# Altium PCB Lora_feather.PcbDoc (part 1 of 2)
Units mm, origin at the board's own origin, x right, y up, seen from the top; angles counter-clockwise.
Board outline 96.47 x 23.21 mm, 2 copper layers (Top Layer, Bottom Layer); 61 components, 62 nets, 278 pads, 260 vias.
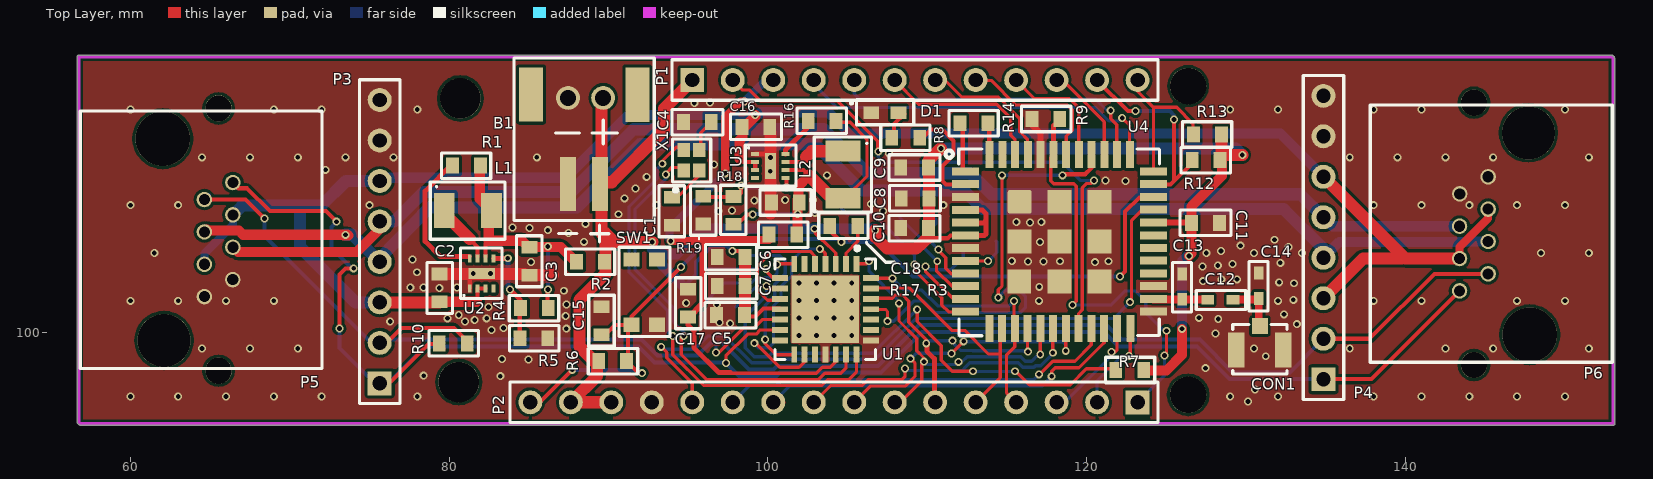
[diagram p0: Top Layer view]
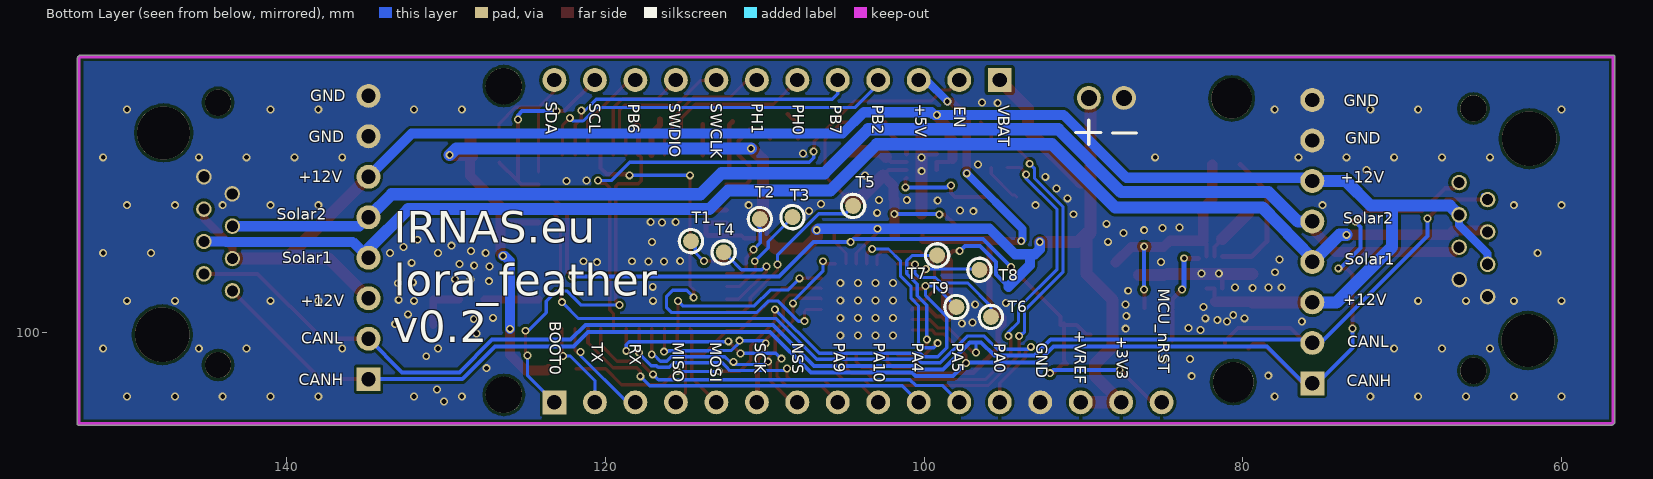
[diagram p1: Bottom Layer view, seen from below]
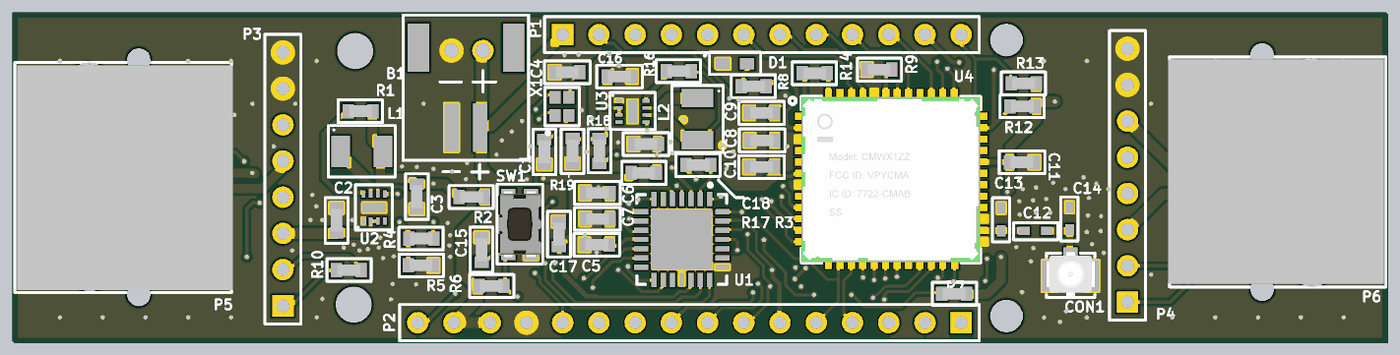
[diagram p2: 3D render of the assembled board from above, using the file's embedded part models]

## Layer stack, top to bottom
Top Solder: solder mask 0.0102, Solder Resist, Dk 3.5
Top Layer: signal copper 0.0356
Dielectric 1: dielectric 0.32, FR-4, Dk 4.2
Bottom Layer: signal copper 0.0356
Bottom Solder: solder mask 0.0102, Solder Resist, Dk 3.5

## Board outline
56.689,94.319 cw(c56.76,94.39) 56.66,94.39 56.66,117.31 cw(c56.76,117.31) 56.76,117.41 152.94,117.41 cw(c152.94,117.31) 153.011,117.381 153.081,117.311 cw(c153.01,117.24) 153.11,117.24 153.11,94.36 cw(c153.03,94.3) 153.13,94.3 cw(c153.03,94.3) 153.03,94.2 56.85,94.2 cw(c56.85,94.3) 56.779,94.229

## Design rules (kind name [scope] priority, off if disabled: settings)
Clearance "Schematic Clearance Constraint" [InNetClass('50R')] p1: gap=0.157 ignorepadtopadclearanceinfootprint=FALSE except(0: Arc-Hole Track-Hole SMDPad-Hole THPad-Hole Via-Hole Fill-Hole Poly-Hole Region-Hole Text-Hole)
Clearance [All] p2: gap=0.178 ignorepadtopadclearanceinfootprint=FALSE
HoleSize [All] p1: absolutevalues=TRUE maxlimit=3.81 minlimit=0.025 maxpercent=80.000 minpercent=20.000
MinimumSolderMaskSliver [All] p1: minsoldermaskwidth=0.01
PlaneConnect [All] p1: planeconnectstyle=Direct reliefexpansion=0.508 reliefentries=4 reliefconductorwidth=0.254 reliefairgap=0.254
PolygonConnect [All] p1: connectstyle=Direct reliefconductorwidth=0.254 reliefentries=4 polygonreliefangle="90 Angle" airgapwidth=0.254
RoutingVias [All] p1: holewidth=0.3 width=0.5 viastyle="Through Hole" minholewidth=0.3 minwidth=0.5 maxholewidth=0.3 maxwidth=0.5
SilkToSilkClearance [All] p1: silktosilkclearance=0.005
SilkToSolderMaskClearance [IsPad] p1: minsilkscreentomaskgap=0.01 clearancetoexposedcopper=TRUE
SolderMaskExpansion [All] p1: expansion=0.102
Width [All] p1: maxlimit=0.762 minlimit=0.203 preferedwidth=0.305
25 further rules are at their usual default settings.

## Classes and differential pairs
net class 50R: ANT NetC12_2

## Components (designator, comment, footprint, x,y, rotation, side; value= is the part's Value field where it differs from the comment)
B1 "Battery connector" BAT_CON 92.56,113.23 r180 top
C1 "10pF cap" 0603CAP 93.97,107.62 r90 top
C2 "10uF" 0603CAP 79.4,102.81 r90 top
C3 "10uF" 0603CAP 85.03,104.48 r270 top
C4 "10pF cap" 0603CAP 95.57,113.21 r0 top
C5 "10uF" 0603CAP 97.65,101.1 r180 top
C6 "0.1uF" 0603CAP 97.69,104.74 r0 top
C7 "0.1uF" 0603CAP 97.69,102.92 r0 top
C8 "10uF" 0603CAP 109.23,108.43 r180 top
C9 "1uF" 0603CAP 109.2,110.36 r180 top
C10 "0.1uF" 0603CAP 109.2,106.56 r0 top
C11 "1uF" 0603CAP 127.45,106.89 r180 top
C12 "100pF" 0402CAP 128.37,102.05 r0 top
C13 "NF" 0402CAP 125.98,102.9 r270 top
C14 "NF" 0402CAP 130.77,102.96 r270 top
C15 "0.1uF" 0603CAP 89.56,100.75 r90 top
C16 "10uF" 0603Cap 99.24,112.91 r0 top
C17 "10uF" 0603CAP 94.99,101.85 r90 top
C18 "22uF" 0603Cap 101.09,108.17 r0 top
CON1 "antena connector" "UFL SMD CONNECTOR" 130.86,99.04 r0 top
D1 "LED diode" LED 107.33,113.8 r180 top
L1 "15uH" "INDUCTOR 3.0X2.5" 81.21,107.66 r0 top
L2 "10uH" "INDUCTOR 3.0X2.5" 104.7,109.88 r270 top
P1 "Header 12" HDR1X12 95.25,115.85 r0 top
P2 "Header 16" HDR1X16 123.19,95.631 r180 top
P3 "Header 8" HDR1X8 75.64,96.82 r90 top
P4 "Header 8" HDR1X8 134.85,97.08 r90 top
P5 "RJ45" "ETHERNET CONN" 62.02,109.42 r270 top
P6 "RJ45" "ETHERNET CONN" 147.8,102.62 r90 top
R1 "0R" 0603RES 83.64,110.41 r0 top
R2 "0R" 0603RES 91.42,104.38 r0 top
R3 "0R" 0603RES 107.31,106.63 r0 top
R4 "1M8" 0603RES 87.9,101.47 r0 top
R5 "576K" 0603RES 82.76,99.72 r180 top
R6 "10K" 0603RES 87.7,98.28 r180 top
R7 "10K" 0603RES 120.14,97.73 r180 top
R8 "1K" 0603RES 111.2,112.16 r0 top
R9 "10K" 0603RES 114.88,113.47 r180 top
R10 "120R" 0603RES 77.7,99.4 r180 top
R12 "10K" 0603RES 130.04,110.75 r0 top
R13 "10K" 0603RES 130.13,112.36 r0 top
R14 "0R" 0603RES 115.48,113.07 r0 top
R16 "0R" 0603RES 105.95,113.22 r0 top
R17 "0R" 0603RES 98.38,106.22 r180 top
R18 "1M1" 0603RES 97.76,105.12 r270 top
R19 "210K" 0603RES 96.01,110.24 r90 top
SW1 "Tactile button" "TACTILE BUTTON" 92.25,102.56 r90 top
T1 "Test_pad" TEST_PAD 114.62,105.74 r180 bottom
T2 "Test_pad" TEST_PAD 110.3,107.13 r180 bottom
T3 "Test_pad" TEST_PAD 108.25,107.25 r180 bottom
T4 "Test_pad" TEST_PAD 112.57,105.04 r180 bottom
T5 "Test_pad" TEST_PAD 104.45,107.95 r180 bottom
T6 "Test_pad" TEST_PAD 95.8,100.986 r180 bottom
T7 "Test_pad" Test_Pad 99.18,104.85 r180 bottom
T8 "Test_pad" Test_Pad 96.52,103.94 r180 bottom
T9 "Test_pad" Test_Pad 97.97,101.61 r180 bottom
U1 "Can bus and tranciver" MCP25625 103.6,101.47 r270 top
U2 "TPS62125DSGR" "WSON-VOLTAGE REGULATOR" 82.04,103.71 r90 top
U3 "TPS62125DSGR" "WSON-Voltage regulator" 100.15,110.46 r0 top
U4 "Lora module ES0" "LORA MODULE ES0" 118.33,105.67 r0 top
X1 "Crystall" IQXC-42 94.71,111.45 r90 top

## Footprints (in the part's own frame and the unit in brackets; to place one, negate y for a bottom-side part, rotate by r counter-clockwise, add the part's x,y. Pads: shape width x height; smd on the part's side, far side on the other; paste and mask are expansions set on the pad)
0402CAP [mm]
  rect 0.8x0.6 smd: 1(-0.78,0.02) 2(0.81,0.02)
  silkscreen extent -1.5,-0.6 1.6,0.6, body extent -0.53,-0.29 0.57,0.31, height 1.5
0603CAP [mm]
  rect 0.8x1 smd paste+0 mask+0.102: 1(-0.873,0) 2(0.873,0)
  silkscreen extent -1.6,-0.8 1.6,0.8, body extent -0.8,-0.4 0.8,0.4, height 0.45
0603Cap [mm]
  rect 0.8x1 smd paste+0 mask+0.102: 1(-0.873,0) 2(0.873,0)
  silkscreen extent -1.6,-0.8 1.6,0.8, body extent -0.8,-0.4 0.8,0.4, height 0.45
0603RES [mm]
  rect 0.8x1 smd paste+0 mask+0.102: 1(-3.429,0.07) 2(-1.682,0.07)
  silkscreen extent -4.13,-0.73 -1.03,0.87, body extent -3.36,-0.33 -1.76,0.47, height 0.45
BAT_CON [mm]
  round 1.5 hole 1: 1(2.9,-1.5) 2(5.1,-1.5)
  rect 1x3.4 smd: 1(3.098,3.899) 2(5.108,3.901)
  rect 1.5x3.4 smd: ""(0.75,-1.7) ""(7.421,-1.711)
  silkscreen extent -0.3,-4 8.5,7.52
"ETHERNET CONN" [mm]
  round 0.97 hole 0.7: 1(0,4.41) 2(1.07,2.62) 3(2.03,4.41) 4(3.1,2.62) 5(4.06,4.41) 6(5.13,2.62) 7(6.09,4.4) 8(7.16,2.62)
  round 1.65 hole 1.65 unplated: ""(-4.65,3.51) ""(11.81,3.51)
  round 3.43 hole 3.43 unplated: ""(-2.75,0.01)
  round 3.33 hole 3.33 unplated: ""(9.91,0.09)
  silkscreen extent -4.48,-5.17 11.67,10.01, body extent -4.32,-5.01 11.56,10.09, height 13.21
HDR1X8 [mm] "Connector; Header; 8 Position"
  rect 1.5x1.5 hole 0.9: 1(0,0)
  round 1.5 hole 0.9: 2(2.54,0) 3(5.08,0) 4(7.62,0) 5(10.16,0) 6(12.7,0) 7(15.24,0) 8(17.78,0)
  silkscreen extent -1.27,-1.27 19.05,1.27
HDR1X12 [mm] "Connector; Header; 12 Position"
  rect 1.5x1.5 hole 0.9: 1(0,0)
  round 1.5 hole 0.9: 2(2.54,0) 3(5.08,0) 4(7.62,0) 5(10.16,0) 6(12.7,0) 7(15.24,0) 8(17.78,0) 9(20.32,0) 10(22.86,0) 11(25.4,0) 12(27.94,0)
  silkscreen extent -1.27,-1.27 29.21,1.27
HDR1X16 [mm] "Connector; Header; 16 Position"
  rect 1.5x1.5 hole 0.9: 1(0,0)
  round 1.5 hole 0.9: 2(2.54,0) 3(5.08,0) 4(7.62,0) 5(10.16,0) 6(12.7,0) 7(15.24,0) 8(17.78,0) 9(20.32,0) 10(22.86,0) 11(25.4,0) 12(27.94,0) 13(30.48,0) 14(33.02,0) 15(35.56,0) 16(38.1,0)
  silkscreen extent -1.27,-1.27 39.37,1.27
"INDUCTOR 3.0X2.5" [mm]
  rect 1.3x2.2 smd: 1(-1.52,0) 2(1.44,0)
  silkscreen extent -2.4,-1.8 2.3,1.8, body extent -1.35,-1.6 1.35,1.6, height 1.5
IQXC-42 [mm] "crystall"
  rect 0.875x0.775 smd: 1(-1.275,0) 2(-1.275,-0.975) 3(0,0) 4(0,-0.975)
  silkscreen extent -2.6,-1.7 0.7,0.7, body extent -1.7,-1.3 0.4,0.3, height 1
LED [mm]
  rect 1x0.8 smd: 1(0.85,0) 2(-0.85,0)
  silkscreen extent -1.81,-0.81 2.13,0.75, body extent -0.9,-0.4 0.8,0.4, height 1
"LORA MODULE ES0" [mm]
  rect 1.7x0.5 smd paste-5: 1(-5.94,4.45) 2(-5.94,3.65) 3(-5.94,2.84) 4(-5.94,2.04) 5(-5.94,1.24) 6(-5.94,0.44) 7(-5.94,-0.35) 8(-5.94,-1.16) 9(-5.94,-1.96) 10(-5.94,-2.75) 11(-5.94,-3.56) 12(-5.94,-4.35) 25(5.862,-4.355) 26(5.862,-3.554) 27(5.862,-2.752) 28(5.862,-1.955) 29(5.862,-1.155) 30(5.862,-0.355) 31(5.86,0.44) 32(5.86,1.25) 33(5.86,2.05) 34(5.86,2.84) 35(5.86,3.65) 36(5.86,4.45)
  rect 0.5x1.7 smd paste-5: 13(-4.44,-5.405) 14(-3.638,-5.405) 15(-2.838,-5.405) 16(-2.038,-5.405) 17(-1.238,-5.405) 18(-0.438,-5.405) 19(0.362,-5.405) 20(1.162,-5.404) 21(1.962,-5.404) 22(2.762,-5.405) 23(3.569,-5.405) 24(4.41,-5.405) 37(4.37,5.5) 38(3.56,5.5) 39(2.77,5.5) 40(1.97,5.5) 41(1.17,5.5) 42(0.37,5.5) 43(-0.43,5.5) 44(-1.23,5.5) 45(-2.03,5.5) 46(-2.83,5.5) 47(-3.63,5.5) 48(-4.44,5.5)
  rrect20% 1.5x1.5 smd: 49(-2.538,2.545)
  rect 1.5x1.5 smd: 50(-0.038,2.545) 51(2.462,2.545) 52(-2.538,0.045) 53(-0.038,0.045) 54(2.462,0.045) 55(-2.563,-2.455) 56(-0.038,-2.455) 57(2.462,-2.455)
  silkscreen extent -7.19,-5.86 6.23,5.86, body extent -6.33,-5.8 6.17,5.8, height 1.76
MCP25625 [mm] "QFN, 28-Leads, Body 6.00x6.00mm, Pitch 0.65mm, Thermal Pad 4.25x4.25mm, IPC Medium Density"
  rect 1x0.37 smd: 1(-2.85,1.95) 2(-2.85,1.3) 3(-2.85,0.65) 4(-2.85,0) 5(-2.85,-0.65) 6(-2.85,-1.3) 7(-2.85,-1.95) 15(2.85,-1.95) 16(2.85,-1.3) 17(2.85,-0.65) 18(2.85,0) 19(2.85,0.65) 20(2.85,1.3) 21(2.85,1.95)
  rect 0.37x1 smd: 8(-1.95,-2.85) 9(-1.3,-2.85) 10(-0.65,-2.85) 11(0,-2.85) 12(0.65,-2.85) 13(1.3,-2.85) 14(1.95,-2.85) 22(1.95,2.85) 23(1.3,2.85) 24(0.65,2.85) 25(0,2.85) 26(-0.65,2.85) 27(-1.3,2.85) 28(-1.95,2.85)
  rect 4.25x4.25 smd: 29(0,0)
  silkscreen extent -3.95,-3.15 3.15,3.15, body extent -3,-3 3,3, height 0.9
"TACTILE BUTTON" [mm]
  rect 0.9x1 smd: 1(-2.072,-0.78) 2(2.028,-0.78) 3(2.028,0.82) 4(-2.072,0.82)
  silkscreen extent -2.8,-1.6 2.8,1.6, body extent -2.32,-1.49 2.28,1.51, height 2.1
TEST_PAD [mm]
  round 1 smd: 1(0,0)
  silkscreen extent -0.73,-0.73 0.73,0.73
Test_Pad [mm]
  round 1 smd: 1(0,0)
  silkscreen extent -0.73,-0.73 0.73,0.73
"UFL SMD CONNECTOR" [mm]
  rect 1x1 smd: 1(0,1.373)
  rect 1.05x2.2 smd: 2(-1.475,-0.127) 2(1.475,-0.127)
  silkscreen extent -1.7,-1.63 1.7,1.47, body extent -1.7,-1.55 1.7,1.55, height 1.25
"WSON-VOLTAGE REGULATOR" [mm] "SON, 8-Leads, Body 2.00x2.00mm, Pitch 0.50mm, Thermal Pad 1.65x0.69mm, IPC Medium Density"
  rect 0.5x0.25 smd: 1(-0.95,0.75) 2(-0.95,0.25) 3(-0.95,-0.25) 4(-0.95,-0.75) 5(0.95,-0.75) 6(0.95,-0.25) 7(0.95,0.25) 8(0.95,0.75)
  rect 0.69x1.65 smd: 9(0,0)
  silkscreen extent -1.57,-1.27 1.6,1.32, body extent -1.05,-1.05 1.05,1.05, height 0.8
"WSON-Voltage regulator" [mm] "SON, 8-Leads, Body 2.00x2.00mm, Pitch 0.50mm, Thermal Pad 1.65x0.69mm, IPC Medium Density"
  rect 0.5x0.25 smd: 1(-0.95,0.75) 2(-0.95,0.25) 3(-0.95,-0.25) 4(-0.95,-0.75) 5(0.95,-0.75) 6(0.95,-0.25) 7(0.95,0.25) 8(0.95,0.75)
  rect 0.69x1.65 smd: 9(0,0)
  silkscreen extent -1.57,-1.27 1.6,1.32, body extent -1.05,-1.05 1.05,1.05, height 0.8

## Part data
B1: library part 1862, "JST-PH 2-Pin SMT Right Angle Breakout Board", Manufacturer="Adafruit Industries", Supplier Part Number 1=485-1862, Manufacturer Part Number=1862, Pricing 1="1=1.5, 10=1.5, 50=1.5, 100=1.5, 1000=1.5, 10000=1.5 (USD)", Stock 1=115, Supplier 1=Mouser
C1 C4: library part 10pF, "Cap Ceramic 10pF 50V X7R 10% SMD 0603 125C T/R", Capacitance="10 pF", Case Size/Dimension=0603, Dielectric=X7R, Manufacturer="Kyocera AVX", Manufacturer Part Number=06035C100KAT2A, Rated Voltage="50 V", Supplier Part Number 1=2665201, Tolerance (%)="±10 %", ComponentLink1Description=https://datasheet.ciiva.com/204/cx7r-204167.pdf, ComponentLink1URL=https://datasheet.ciiva.com/204/cx7r-204167.pdf, ComponentLink2Description=https://datasheet.ciiva.com/28611/1679506-28611544.pdf, ComponentLink2URL=https://datasheet.ciiva.com/28611/1679506-28611544.pdf, ComponentLink3Description=https://datasheet.ciiva.com/22677/1679506-22677033.pdf, ComponentLink3URL=https://datasheet.ciiva.com/22677/1679506-22677033.pdf, ComponentLink4Description=https://datasheet.ciiva.com/16327/cx7r-16327067.pdf, ComponentLink4URL=https://datasheet.ciiva.com/16327/cx7r-16327067.pdf, ComponentLink5Description=https://datasheet.ciiva.com/5416/cx7r-5416268.pdf, ComponentLink5URL=https://datasheet.ciiva.com/5416/cx7r-5416268.pdf, ComponentLink6Description=https://datasheet.ciiva.com/15212/getdatasheetpartid-317346-15212284.pdf, ComponentLink6URL=https://datasheet.ciiva.com/15212/getdatasheetpartid-317346-15212284.pdf, Stock 1=0, Supplier 1=Farnell
C2 C3 C5 C8 C16 C17: library part "10uF Cap", "MURATA         ZRB18AR61E106ME01L             SMD Multilayer Ceramic Capacitor, 0603 [1608 Metric], 10 F, 25 V,  20%, X5R, ZRA Series", Capacitance=10µF, Manufacturer=Murata, Manufacturer Part Number=ZRB18AR61E106ME01L, Operating Temperature="-55°C ~ 85°C", Package / Case="0603 (1608 Metric)", Ratings=-, Supplier Part Number 1=2469398, Temperature Coefficient=X5R, Tolerance=±20%, Voltage - Rated=25V, Applications="Acoustic Noise Reduction", Category=Capacitors, ComponentLink1Description=http://www.farnell.com/datasheets/2243360.pdf, ComponentLink1URL=http://www.farnell.com/datasheets/2243360.pdf, ComponentLink2Description=http://www.farnell.com/datasheets/2163235.pdf, ComponentLink2URL=http://www.farnell.com/datasheets/2163235.pdf, ComponentLink3Description=http://search.murata.co.jp/Ceramy/image/img/A01X/G101/ENG/ZRB18AR61E106ME01-01.pdf, ComponentLink3URL=http://search.murata.co.jp/Ceramy/image/img/A01X/G101/ENG/ZRB18AR61E106ME01-01.pdf, Family="Ceramic Capacitors", Features="Interposer Termination", Height - Seated (Max)=-, Lead Spacing=-, Lead Style=-, Mounting Type="Surface Mount, MLCC", Packaging="Tape & Reel (TR)", Pricing 1="5=0.411, 50=0.187, 250=0.142, 500=0.0978, 1500=0.091 (GBP)", Series=ZRB, Size / Dimension="0.063\" L x 0.031\" W (1.60mm x 0.80mm)", Stock 1=0, Supplier 1=Farnell, Thickness (Max)="0.047\" (1.20mm)"
C6 C7 C10 C15: "Multilayer Ceramic Capacitors MLCC - SMD/SMT .1uF 50Volts X7R +/-10% 0603 STD", Capacitance=0.1µF, Capacitance Tolerance="± 10%", Ceramic Capacitor Case="0603 [1608 Metric]", Dielectric Characteristic=X7R, Manufacturer=KEMET, Manufacturer Part Number=C0603C104K4RAC7081, Operating Temperature Max=125°C, Operating Temperature Min=-55°C, Supplier Part Number 1=2522597, Voltage Rating=16V, Automotive Qualification Standard=-, ComponentLink1Description=http://www.farnell.com/datasheets/2112158.pdf, ComponentLink1URL=http://www.farnell.com/datasheets/2112158.pdf, ComponentLink2Description=http://www.farnell.com/datasheets/2316283.pdf, ComponentLink2URL=http://www.farnell.com/datasheets/2316283.pdf, ComponentLink3Description=https://api.kemet.com/component-edge/download/datasheet/C0603C104K4RAC7081.pdf, ComponentLink3URL=https://api.kemet.com/component-edge/download/datasheet/C0603C104K4RAC7081.pdf, MSL="MSL 1 - Unlimited", Packaging="Cut Tape", Pricing 1="10=0.0639, 100=0.0337, 500=0.0247, 2500=0.0209 (EUR)", Product Range="C Series", Stock 1=131460, Supplier 1=Farnell, SVHC="No SVHC (15-Jun-2015)"
C9 C11: "1µF 50V Ceramic Capacitor X5R 0603 (1608 Metric) 0.063\" L x 0.031\" W (1.60mm x 0.80mm)", Capacitance=1µF, Manufacturer=TDK, Manufacturer Part Number=C1608X5R1E105K080AC, Operating Temperature="-55°C ~ 85°C", Package / Case="0603 (1608 Metric)", PCN Part Number="MLCC Part Number Change 30/Nov/2012", Ratings=-, Standard Package=1, Supplier Part Number 1=2346891, Temperature Coefficient=X5R, Tolerance=±10%, Voltage - Rated=25V, Applications="General Purpose", Category=Capacitors, ComponentLink1Description=https://datasheet.ciiva.com/28451/1796654-28451158.pdf, ComponentLink1URL=https://datasheet.ciiva.com/28451/1796654-28451158.pdf, ComponentLink2Description=https://datasheet.ciiva.com/16394/e412-c-16394039.pdf, ComponentLink2URL=https://datasheet.ciiva.com/16394/e412-c-16394039.pdf, ComponentLink3Description=https://datasheet.ciiva.com/6292/tdkmlcccaprange-6292456.pdf, ComponentLink3URL=https://datasheet.ciiva.com/6292/tdkmlcccaprange-6292456.pdf, ComponentLink4Description=https://datasheet.ciiva.com/6292/tdkmlcccaprange-6292458.pdf, ComponentLink4URL=https://datasheet.ciiva.com/6292/tdkmlcccaprange-6292458.pdf, ComponentLink5Description=https://datasheet.ciiva.com/22676/1571323-22676922.pdf, ComponentLink5URL=https://datasheet.ciiva.com/22676/1571323-22676922.pdf, Design Resources="20 W Non-Isolated Buck LED Driver Using PL LNK460KG", Family="Ceramic Capacitors", Features=-, Height - Seated (Max)=-, Lead Spacing=-, Lead Style=-, Mounting Type="Surface Mount, MLCC", Online Catalog="C Series, General Purpose", Other Names=445-5146-6, Packaging=Digi-Reel®, Pricing 1="10=0.0585, 100=0.0449, 500=0.0335, 1000=0.0279 (GBP)", Product Training Modules="C Series General Applications SEAT, CCV, and TVCL Design Tools Guide to Replacing an Electrolytic Capacitor with an MLCC", RoHS Information="RoHS Certificate-MLCC", Series=C, Size / Dimension="0.063\" L x 0.031\" W (1.60mm x 0.80mm)", Stock 1=0, Supplier 1=Farnell, Thickness (Max)="0.037\" (0.95mm)"
C12: library part 0F, "MULTICOMP         MC0402B101K500CT            SMD Multilayer Ceramic Capacitor, MC Series, 100 pF,  10%, X7R, 50 V, 0402 [1005 Metric]", Capacitance Tolerance="± 10%", Capacitor Case Style="0402 [1005 Metric]", Capacitor Terminals=SMD, Dielectric Characteristic=X7R, Manufacturer=Multicomp, Manufacturer Part Number=MC0402B101K500CT, Operating Temperature Max=125°C, Operating Temperature Min=-55°C, Supplier Part Number 1=1758968, Voltage Rating=50V, Capacitance=100pF, Ceramic Capacitor Case="0402 [1005 Metric]", ComponentLink1Description=https://datasheet.ciiva.com/36858/1870456-36858427.pdf, ComponentLink1URL=https://datasheet.ciiva.com/36858/1870456-36858427.pdf, ComponentLink2Description=https://datasheet.ciiva.com/36857/1825492-36857949.pdf, ComponentLink2URL=https://datasheet.ciiva.com/36857/1825492-36857949.pdf, ComponentLink3Description=https://datasheet.ciiva.com/36858/1870456-36858493.pdf, ComponentLink3URL=https://datasheet.ciiva.com/36858/1870456-36858493.pdf, MSL=-, Packaging="Tape & Reel", Pricing 1="10=0.0386, 100=0.0239, 500=0.0142, 2500=0.0091 (EUR)", Product Range="MULTICOMP - MC Series", Stock 1=250, Supplier 1=Farnell, SVHC="To Be Advised"
C13 C14: library part Cap0402
C18: "MURATA         ZRB18AR60J226ME01L             SMD Multilayer Ceramic Capacitor, 0603 [1608 Metric], 22 F, 6.3 V,  20%, X5R, ZRA Series", Capacitance=22µF, Manufacturer=Murata, Manufacturer Part Number=ZRB18AR60J226ME01L, Operating Temperature="-55°C ~ 85°C", Package / Case="0603 (1608 Metric)", Ratings=-, Supplier Part Number 1=2469395, Temperature Coefficient=X5R, Tolerance=±20%, Voltage - Rated=6.3V, Applications="Acoustic Noise Reduction", Category=Capacitors, Family="Ceramic Capacitors", Features="Derating Recommended, Interposer Termination", Height - Seated (Max)=-, Lead Spacing=-, Lead Style=-, Mounting Type="Surface Mount, MLCC", Packaging="Tape & Reel (TR)", Pricing 1="5=0.54, 50=0.246, 250=0.175, 500=0.129, 1500=0.111 (EUR)", Series=ZRB, Size / Dimension="0.063\" L x 0.031\" W (1.60mm x 0.80mm)", Stock 1=4282, Supplier 1=Farnell, Thickness (Max)="0.047\" (1.20mm)"
CON1: library part U.FL-R-SMT-1(10), "CONN UMC JACK STR 50 OHM SMD", Dielectric Material="Liquid Crystal Polymer (LCP)", Frequency - Max=6GHz, Housing Color=Beige, Manufacturer=Hirose, Operating Temperature="-40°C ~ 90°C", Standard Package=2,500, Supplier Part Number 1=1688077, Voltage Rating=-, Body Finish=Silver, Body Material="Phosphor Bronze", Cable Group=-, Category="Connectors, Interconnects", Center Contact Material=Brass, Center Contact Plating=Gold, ComponentLink1Description=https://datasheet.ciiva.com/11762/0900766b8105243f-11762474.pdf, ComponentLink1URL=https://datasheet.ciiva.com/11762/0900766b8105243f-11762474.pdf, ComponentLink2Description=https://datasheet.ciiva.com/7651/91524-7651914.pdf, ComponentLink2URL=https://datasheet.ciiva.com/7651/91524-7651914.pdf, ComponentLink3Description=https://datasheet.ciiva.com/7651/91524-7651915.pdf, ComponentLink3URL=https://datasheet.ciiva.com/7651/91524-7651915.pdf, Connector Style="U.FL, Ultra Miniature Coaxial", Connector Type="Receptacle, Male Pin", Contact Termination=Solder, Family="Coaxial Connectors (RF)", Fastening Type=Snap-On, Featured Product="U.FL Series Connectors", Features=-, Impedance="50 Ohm", Ingress Protection=-, Manufacturer Part Number=U.FL-R-SMT-1(10), Mounting Type="Surface Mount", Online Catalog="UMCC (Ultra Miniature Coax Connectors), U.FL Series", Other Names="H11891TR  Q5400621  U.FL-R-SMT-1 10  U.FL-R-SMT-1(10)-ND  UFLRSMT110", Packaging="Tape & Reel (TR)", Pricing 1="10=0.49, 100=0.476, 500=0.424, 1000=0.394, 2500=0.386, 5000=0.378 (GBP)", Series=U.FL, Shield Termination=Solder, Stock 1=38546, Supplier 1=Farnell
D1: library part LED, Manufacturer=Kingbright, Manufacturer Part Number=KPG1-1608VGC-TT-5MAV, Supplier Part Number 1=2671383, ComponentLink1Description=http://www.farnell.com/datasheets/2163492.pdf, ComponentLink1URL=http://www.farnell.com/datasheets/2163492.pdf, Pricing 1="5=0.579, 25=0.542, 100=0.504, 250=0.48, 500=0.443, 1000=0.406 (EUR)", Stock 1=3955, Supplier 1=Farnell
L1: library part "15uH inductor", "Fixed Inductors 15uH 0.28ohms 0.56A", Current - Saturation=500mA, DC Resistance (DCR)="330 mOhm Max", Frequency - Test=1MHz, Inductance=15µH, Manufacturer=TDK, Manufacturer Part Number=VLF302515MT-150M, Operating Temperature="-40°C ~ 105°C", Package / Case="Non Standard", Standard Package=1, Supplier Part Number 1=2455319, Tolerance=±20%, Category="Inductors, Coils, Chokes", ComponentLink1Description=https://datasheet.ciiva.com/46449/1759590-46449866.pdf, ComponentLink1URL=https://datasheet.ciiva.com/46449/1759590-46449866.pdf, Current Rating=500mA, Dynamic Catalog="VLF-M and VLF-MT Series", Family="Fixed Inductors", Height - Seated (Max)="0.059\" (1.50mm)", Material - Core=Ferrite, Mounting Type="Surface Mount", Other Names=445-9635-6, Packaging=Digi-Reel®, Pricing 1="5=1.46, 50=0.912, 250=0.895, 500=0.698, 1000=0.621, 2000=0.589, 10000=0.557 (EUR)", Series=VLF-MT, Shielding=Shielded, Size / Dimension="0.118\" L x 0.098\" W (3.00mm x 2.50mm)", Stock 1=1162, Supplier 1=Farnell, Type=Wirewound, Unit PriceUSD=VLF-MT
L2: "COILCRAFT   LPS3314-103MRB   INDUCTOR, SHLD, 10UH, 20%, 0.65A, SMD", DC Resistance Max=0.33ohm, Inductance=10µH, Inductance Tolerance="± 20%", Inductor Construction=Shielded, Manufacturer=Coilcraft, Manufacturer Part Number=LPS3314-103MRB, Power Inductor Case="3.3mm x 3.3mm x 1.3mm", RMS Current (Irms)=650mA, Saturation Current (Isat)=660mA, Supplier Part Number 1=2408046, ComponentLink1Description=https://datasheet.ciiva.com/46384/1805322-46384791.pdf, ComponentLink1URL=https://datasheet.ciiva.com/46384/1805322-46384791.pdf, ComponentLink2Description=https://datasheet.ciiva.com/46438/1805322-46438520.pdf, ComponentLink2URL=https://datasheet.ciiva.com/46438/1805322-46438520.pdf, Packaging="Cut Tape", Pricing 1="1=0.892, 250=0.701, 500=0.55 (EUR)", Product Range="LPS3314 Series", Stock 1=67, Supplier 1=Farnell, SVHC="No SVHC (15-Jun-2015)"
P1: "Header, 12-Pin", LatestRevisionDate=17-Jul-2002, LatestRevisionNote="Re-released for DXP Platform.", Publisher="Altium Limited"
P2: "Header, 16-Pin", LatestRevisionDate=17-Jul-2002, LatestRevisionNote="Re-released for DXP Platform.", Publisher="Altium Limited"
P3 P4: "Header, 8-Pin", LatestRevisionDate=17-Jul-2002, LatestRevisionNote="Re-released for DXP Platform.", Publisher="Altium Limited"
P5 P6: library part 44620-0001, "MODULAR JACK", Manufacturer=Molex, Supplier Part Number 1=2782009, Body Orientation="Right Angle", Category="Connector Telephone and Telecom", ComponentLink1Description=https://datasheet.ciiva.com/26929/getdatasheetpartid-767379-26929525.pdf, ComponentLink1URL=https://datasheet.ciiva.com/26929/getdatasheetpartid-767379-26929525.pdf, ComponentLink2Description=https://datasheet.ciiva.com/19472/2040276-19472615.pdf, ComponentLink2URL=https://datasheet.ciiva.com/19472/2040276-19472615.pdf, ComponentLink3Description=https://datasheet.ciiva.com/30213/71510446200001-modular-jacks-plug-30213975.pdf, ComponentLink3URL=https://datasheet.ciiva.com/30213/71510446200001-modular-jacks-plug-30213975.pdf, ComponentLink4Description=https://datasheet.ciiva.com/4562/0446200001-modular-jacks-plug-145952-4562632.pdf, ComponentLink4URL=https://datasheet.ciiva.com/4562/0446200001-modular-jacks-plug-145952-4562632.pdf, ComponentLink5Description=https://datasheet.ciiva.com/16074/832720446200001-modular-jacks-plug-16074650.pdf, ComponentLink5URL=https://datasheet.ciiva.com/16074/832720446200001-modular-jacks-plug-16074650.pdf, ComponentLink6Description=https://datasheet.ciiva.com/1107/66995-1107778.pdf, ComponentLink6URL=https://datasheet.ciiva.com/1107/66995-1107778.pdf, ComponentLink7Description=https://datasheet.ciiva.com/9393/0446200001-modular-jacks-plug-9393019.pdf, ComponentLink7URL=https://datasheet.ciiva.com/9393/0446200001-modular-jacks-plug-9393019.pdf, ComponentLink8Description=https://datasheet.ciiva.com/16649/0446200001-modular-jacks-plug-16649582.pdf, ComponentLink8URL=https://datasheet.ciiva.com/16649/0446200001-modular-jacks-plug-16649582.pdf, Gender=RCP, Manufacturer Part Number=44620-0001, Mounting="Through Hole", Number of Contacts=8, Pitch="2.04 mm", Pricing 1="1=0.689, 50=0.675, 100=0.67, 250=0.669, 500=0.668, 1000=0.667 (EUR)", Rad Hard=No, Stock 1=1202, Supplier 1=Farnell, Termination Method=Solder, Type=RJ-45
R1 R2 R3 R14 R16 R17: "RES SMD 0.0OHM JUMPER 1/10W 0603", Manufacturer=Vishay, Manufacturer Part Number=CRCW06030000Z0EA, Operating Temperature="-55°C ~ 155°C", Package / Case="0603 (1608 Metric)", Power (Watts)="0.1W, 1/10W", Resistance (Ohms)=0.0, Standard Package=1, Supplier Part Number 1=2122112, Temperature Coefficient=-, Tolerance=Jumper, Category=Resistors, ComponentLink1Description=https://datasheet.ciiva.com/2461/dcrcwe3-2461968.pdf, ComponentLink1URL=https://datasheet.ciiva.com/2461/dcrcwe3-2461968.pdf, ComponentLink2Description=https://datasheet.ciiva.com/2461/dcrcwe3-2461969.pdf, ComponentLink2URL=https://datasheet.ciiva.com/2461/dcrcwe3-2461969.pdf, ComponentLink3Description=https://datasheet.ciiva.com/2461/dcrcwe3-2461970.pdf, ComponentLink3URL=https://datasheet.ciiva.com/2461/dcrcwe3-2461970.pdf, ComponentLink4Description=https://datasheet.ciiva.com/8340/dcrcwe3-8340197.pdf, ComponentLink4URL=https://datasheet.ciiva.com/8340/dcrcwe3-8340197.pdf, ComponentLink5Description=https://datasheet.ciiva.com/16941/dcrcw-16941302.pdf, ComponentLink5URL=https://datasheet.ciiva.com/16941/dcrcw-16941302.pdf, ComponentLink6Description=https://datasheet.ciiva.com/16199/dcrcwe3-16199063.pdf, ComponentLink6URL=https://datasheet.ciiva.com/16199/dcrcwe3-16199063.pdf, ComponentLink7Description=https://datasheet.ciiva.com/16725/70201119-16725175.pdf, ComponentLink7URL=https://datasheet.ciiva.com/16725/70201119-16725175.pdf, ComponentLink8Description=https://datasheet.ciiva.com/26316/fld-crcw-e3-data-en-26316615.pdf, ComponentLink8URL=https://datasheet.ciiva.com/26316/fld-crcw-e3-data-en-26316615.pdf, ComponentLink9Description=https://datasheet.ciiva.com/5544/dcrcwe3-109170-5544344.pdf, ComponentLink9URL=https://datasheet.ciiva.com/5544/dcrcwe3-109170-5544344.pdf, ComponentLink10Description=https://datasheet.ciiva.com/7841/1720486-7841816.pdf, ComponentLink10URL=https://datasheet.ciiva.com/7841/1720486-7841816.pdf, ComponentLink11Description=https://datasheet.ciiva.com/7841/1720486-7841817.pdf, ComponentLink11URL=https://datasheet.ciiva.com/7841/1720486-7841817.pdf, ComponentLink12Description=https://datasheet.ciiva.com/7841/125364-7841818.pdf, ComponentLink12URL=https://datasheet.ciiva.com/7841/125364-7841818.pdf, ComponentLink13Description=https://datasheet.ciiva.com/16721/70201119-16721450.pdf, ComponentLink13URL=https://datasheet.ciiva.com/16721/70201119-16721450.pdf, Composition="Thick Film", EDA / CAD Models="Download from Accelerated Designs", Family="Chip Resistor - Surface Mount", Features="Automotive AEC-Q200", Height="0.020\" (0.50mm)", Kits="541-1419-ND  - RESISTOR KIT 0-1M 1/10W 6100PCS", Number of Terminations=2, Online Catalog="CRCW - Automotive Series", Other Names=541-0.0GCT, Packaging="Cut Tape (CT)", Pricing 1="5000=0.0046 (EUR)", Series=CRCW, Size / Dimension="0.061\" L x 0.033\" W (1.55mm x 0.85mm)", Stock 1=1145000, Supplier 1=Farnell, Supplier Device Package="0603 (1608 Metric)"
R4: library part "1.8Mohm Res", Manufacturer=Multicomp, Manufacturer Part Number=MCHVR03FTFX1804, Supplier Part Number 1=2825653, Pricing 1="10=0.0383, 100=0.0291, 500=0.0206, 1000=0.0165, 2500=0.0138, 5000=0.0119, 25000=0.0085 (EUR)", Stock 1=4880, Supplier 1=Farnell
R5: library part "576K Res", "Res Thick Film 0603 576K Ohm 1% 0.1W(1/10W) ±100ppm/C Molded SMD Automotive Punched T/R", Manufacturer=Panasonic, Manufacturer Part Number=ERJ-3EKF5763V, Operating Temperature="-55°C ~ 155°C", Package / Case="0603 (1608 Metric)", Power (Watts)="0.1W, 1/10W", Resistance (Ohms)=576k, Standard Package=1, Supplier Device Package=0603, Supplier Part Number 1=2303298, Temperature Coefficient=±100ppm/°C, Tolerance=±1%, Category=Resistors, ComponentLink1Description=https://datasheet.ciiva.com/9181/aoa0000ce2-9181015.pdf, ComponentLink1URL=https://datasheet.ciiva.com/9181/aoa0000ce2-9181015.pdf, ComponentLink2Description=https://datasheet.ciiva.com/22668/1678782-22668424.pdf, ComponentLink2URL=https://datasheet.ciiva.com/22668/1678782-22668424.pdf, ComponentLink3Description=https://datasheet.ciiva.com/9181/aoa0000ce2-9181017.pdf, ComponentLink3URL=https://datasheet.ciiva.com/9181/aoa0000ce2-9181017.pdf, ComponentLink4Description=https://datasheet.ciiva.com/24031/aoa0000ce2-24031849.pdf, ComponentLink4URL=https://datasheet.ciiva.com/24031/aoa0000ce2-24031849.pdf, ComponentLink5Description=https://datasheet.ciiva.com/46420/1678782-46420010.pdf, ComponentLink5URL=https://datasheet.ciiva.com/46420/1678782-46420010.pdf, ComponentLink6Description=https://datasheet.ciiva.com/16768/70260748-16768539.pdf, ComponentLink6URL=https://datasheet.ciiva.com/16768/70260748-16768539.pdf, ComponentLink7Description=https://datasheet.ciiva.com/16778/70260748-16778396.pdf, ComponentLink7URL=https://datasheet.ciiva.com/16778/70260748-16778396.pdf, ComponentLink8Description=https://datasheet.ciiva.com/30145/aoa0000ce2-30145500.pdf, ComponentLink8URL=https://datasheet.ciiva.com/30145/aoa0000ce2-30145500.pdf, Composition="Thick Film", EDA / CAD Models="Download from Accelerated Designs", Family="Chip Resistor - Surface Mount", Features="Automotive AEC-Q200", Height="0.022\" (0.55mm)", Kits="RSM5H-ND  - RES KIT 100K-1M 1/10W 4850PCS", Number of Terminations=2, Online Catalog="ERJ Series", Other Names="ERJ-3EKF5763 ERJ3EKF5763 P576KHCT", Packaging="Cut Tape (CT)", Pricing 1="10=0.0416, 100=0.0243, 500=0.0181, 1000=0.0162 (EUR)", Series=ERJ, Size / Dimension="0.063\" L x 0.031\" W (1.60mm x 0.80mm)", Stock 1=39830, Supplier 1=Farnell
R6 R7 R9 R12 R13: "TE CONNECTIVITY / NEOHM         CPF0603F10KC1             SMD Chip Resistor, Thin Film, 10 kohm, 50 V, 0603 [1608 Metric], 63 mW,  1%, CPF Series", Manufacturer="TE Connectivity Neohm", Manufacturer Part Number=CPF0603F10KC1, Operating Temperature Max=125°C, Operating Temperature Min=-55°C, Operating Temperature Range="-55°C to +125°C", Overload Voltage=120V, Package / Case=0603, Power Rating=63mW, Resistance=10kohm, Resistance Tolerance="± 1%", Resistor Case Style="0603 [1608 Metric]", Resistor Element Material="Thin Film", Resistor Mounting=SMD, Supplier Part Number 1=1527581RL, Temperature Coefficient="± 50ppm/°C", Voltage Rating=60V, Climatic Category=55/125/55, ComponentLink1Description=https://datasheet.ciiva.com/24494/29261eng-ds-1773200-f-24494553.pdf, ComponentLink1URL=https://datasheet.ciiva.com/24494/29261eng-ds-1773200-f-24494553.pdf, ComponentLink2Description=https://datasheet.ciiva.com/7789/eng-ds-1773200-j-7789563.pdf, ComponentLink2URL=https://datasheet.ciiva.com/7789/eng-ds-1773200-j-7789563.pdf, ComponentLink3Description=https://datasheet.ciiva.com/16902/eng-ds-1773200-i-16902044.pdf, ComponentLink3URL=https://datasheet.ciiva.com/16902/eng-ds-1773200-i-16902044.pdf, ComponentLink4Description=https://datasheet.ciiva.com/22692/1786775-22692861.pdf, ComponentLink4URL=https://datasheet.ciiva.com/22692/1786775-22692861.pdf, External Depth=0.45mm, External Length / Height=1.6mm, External Width=0.8mm, MSL="(Not Available)", No. of Pins=2, Packaging="Cut Tape", Product Range="TE CONNECTIVITY - CPF Series", Resistor Element Type="Thin Film", Series=CPF, Stock 1=0, Supplier 1=Farnell, SVHC="To Be Advised"
R8: "Thick Film Resistors - SMD CRGH0603 1% 1K0 0.2W", Manufacturer="TE Connectivity", Manufacturer Part Number=CRGH0603F1K0, Power Rating=200mW, Resistance=1kohm, Resistance Tolerance="± 1%", Resistor Case Style="0603 [1608 Metric]", Resistor Element Type="Thick Film", Supplier Part Number 1=2332003, Temperature Coefficient="± 100ppm/°C", Voltage Rating=50V, Automotive Qualification Standard=-, ComponentLink1Description=https://datasheet.ciiva.com/46386/1755795-46386536.pdf, ComponentLink1URL=https://datasheet.ciiva.com/46386/1755795-46386536.pdf, ComponentLink2Description=https://datasheet.ciiva.com/22707/1755795-22707917.pdf, ComponentLink2URL=https://datasheet.ciiva.com/22707/1755795-22707917.pdf, ComponentLink3Description=https://datasheet.ciiva.com/12574/eng-ds-1773204-g-12574479.pdf, ComponentLink3URL=https://datasheet.ciiva.com/12574/eng-ds-1773204-g-12574479.pdf, MSL=-, Packaging="Cut Tape", Pricing 1="10=0.0159, 100=0.0135, 500=0.0104, 1000=0.0093, 2500=0.0088 (EUR)", Product Range="CRG Series", Stock 1=4245, Supplier 1=Farnell, SVHC="No SVHC (15-Jun-2015)"
R10: "RES SMD 120 OHM 1% 1/10W 0603", Case Code - in=0603, Case Code - mm=1608, Manufacturer=Vishay, Manufacturer Part Number=CRCW0603120RFKEA, Operating Temperature Range="- 55 C to + 155 C", Package / Case="0603 (1608 metric)", Power Rating="100 mW", Resistance="120 Ohms", Supplier Part Number 1=1652832RL, Temperature Coefficient="100 PPM / K", Tolerance="1 %", Voltage Rating="75 V", Brand="Vishay / Dale", ComponentLink1Description=https://datasheet.ciiva.com/11811/0900766b80d98afc-11811523.pdf, ComponentLink1URL=https://datasheet.ciiva.com/11811/0900766b80d98afc-11811523.pdf, ComponentLink2Description=https://datasheet.ciiva.com/2513/dcrcwe3-2513575.pdf, ComponentLink2URL=https://datasheet.ciiva.com/2513/dcrcwe3-2513575.pdf, ComponentLink3Description=https://datasheet.ciiva.com/2513/dcrcwe3-2513576.pdf, ComponentLink3URL=https://datasheet.ciiva.com/2513/dcrcwe3-2513576.pdf, ComponentLink4Description=https://datasheet.ciiva.com/26316/fld-crcw-e3-data-en-26316568.pdf, ComponentLink4URL=https://datasheet.ciiva.com/26316/fld-crcw-e3-data-en-26316568.pdf, ComponentLink5Description=https://datasheet.ciiva.com/2513/dcrcwe3-2513577.pdf, ComponentLink5URL=https://datasheet.ciiva.com/2513/dcrcwe3-2513577.pdf, ComponentLink6Description=https://datasheet.ciiva.com/5544/dcrcwe3-109170-5544139.pdf, ComponentLink6URL=https://datasheet.ciiva.com/5544/dcrcwe3-109170-5544139.pdf, ComponentLink7Description=https://datasheet.ciiva.com/7777/1533075-7777275.pdf, ComponentLink7URL=https://datasheet.ciiva.com/7777/1533075-7777275.pdf, ComponentLink8Description=https://datasheet.ciiva.com/7777/1697337-7777276.pdf, ComponentLink8URL=https://datasheet.ciiva.com/7777/1697337-7777276.pdf, ComponentLink9Description=https://datasheet.ciiva.com/16725/70201119-16725181.pdf, ComponentLink9URL=https://datasheet.ciiva.com/16725/70201119-16725181.pdf, Factory Pack Quantity=5000, Height="0.45 mm", Length="1.55 mm", Packaging=Reel, Product="Thick Film Resistors SMD", Product Category="Thick Film Resistors - SMD", RoHS=Details, Series=CRCW, Stock 1=0, Supplier 1=Farnell, Termination Style=SMD/SMT, Unit Weight="0.000071 oz", Width="0.85 mm"
R18: Manufacturer=Multicomp, Manufacturer Part Number=MCHVR03FTFX1104, Supplier Part Number 1=2823300, Pricing 1="5000=0.0122, 25000=0.0088 (EUR)", Stock 1=10000, Supplier 1=Farnell
R19: "Thick Film Resistors - SMD 1/10watt 210Kohms 1%", Case Code - in=0603, Case Code - mm=1608, Case Height="0.45 mm", Case Length="1.55 mm", Case Width="0.85 mm", Manufacturer=Vishay, Manufacturer Part Number=CRCW0603210KFKEA, Operating Temperature Range="- 55 C to + 155 C", Package / Case="0603 (1608 metric)", Power Rating="100 mW", Resistance="210 kOhms", Supplier Part Number 1=2138527, Temperature Coefficient="100 PPM / K", Tolerance="1 %", Voltage Rating="75 V", Brand="Vishay / Dale", ComponentLink1Description=https://datasheet.ciiva.com/5544/dcrcwe3-109170-5544760.pdf, ComponentLink1URL=https://datasheet.ciiva.com/5544/dcrcwe3-109170-5544760.pdf, ComponentLink2Description=https://datasheet.ciiva.com/16883/dcrcwe3-16883336.pdf, ComponentLink2URL=https://datasheet.ciiva.com/16883/dcrcwe3-16883336.pdf, ComponentLink3Description=https://datasheet.ciiva.com/22871/70201119-22871881.pdf, ComponentLink3URL=https://datasheet.ciiva.com/22871/70201119-22871881.pdf, ComponentLink4Description=https://datasheet.ciiva.com/16779/70201119-16779626.pdf, ComponentLink4URL=https://datasheet.ciiva.com/16779/70201119-16779626.pdf, ComponentLink5Description=https://datasheet.ciiva.com/7673/1697337-7673292.pdf, ComponentLink5URL=https://datasheet.ciiva.com/7673/1697337-7673292.pdf, ComponentLink6Description=https://datasheet.ciiva.com/7673/1697337-7673293.pdf, ComponentLink6URL=https://datasheet.ciiva.com/7673/1697337-7673293.pdf, ComponentLink7Description=https://datasheet.ciiva.com/16449/dcrcwe3-16449149.pdf, ComponentLink7URL=https://datasheet.ciiva.com/16449/dcrcwe3-16449149.pdf, ComponentLink8Description=https://datasheet.ciiva.com/22705/1697337-22705951.pdf, ComponentLink8URL=https://datasheet.ciiva.com/22705/1697337-22705951.pdf, Factory Pack Quantity=5000, Packaging=Reel, Pricing 1="10=0.0283, 100=0.0198, 500=0.0145, 1000=0.0091 (EUR)", Product="Thick Film Resistors SMD", Product Category="Thick Film Resistors - SMD", RoHS=Details, Series=CRCW, Stock 1=17185, Supplier 1=Farnell, Unit Weight="0.000071 oz"
SW1: library part KMR221NGLFS, "SWITCH TACTILE SPST-NO 0.05A 32V", Actuator Color=N/A, Contact Rating @ Voltage="1 A", Dielectric Strength=">=250 Vrms", Manufacturer="ITT C&K", Maximum DC Voltage Rating="32 V", Minimum Insulation Resistance=">=1000 MOhm", Operating Force="2 N", Operating Temperature="-40 to 85 C", Supplier Part Number 1=2845727, Actuator Length="0.5 mm", Actuator Style="Round Button", Base Material=N/A, Body Orientation=Straight, ComponentLink1Description=https://datasheet.ciiva.com/16443/kmr221nglfs-16443038.pdf, ComponentLink1URL=https://datasheet.ciiva.com/16443/kmr221nglfs-16443038.pdf, ComponentLink2Description=https://datasheet.ciiva.com/2900/kmr2-9aug12-2900169.pdf, ComponentLink2URL=https://datasheet.ciiva.com/2900/kmr2-9aug12-2900169.pdf, ComponentLink3Description=https://datasheet.ciiva.com/2900/kmr2-9aug12-2900170.pdf, ComponentLink3URL=https://datasheet.ciiva.com/2900/kmr2-9aug12-2900170.pdf, ComponentLink4Description=https://datasheet.ciiva.com/16695/kmr2-9aug12-16695914.pdf, ComponentLink4URL=https://datasheet.ciiva.com/16695/kmr2-9aug12-16695914.pdf, ComponentLink5Description=https://datasheet.ciiva.com/2900/kmr2-9aug12-2900171.pdf, ComponentLink5URL=https://datasheet.ciiva.com/2900/kmr2-9aug12-2900171.pdf, Contact Material=Silver, Contact Plating=Silver, Dimension="2.8 x 4.6 x 1.9 mm", ECCN=EAR99, Electrical Life=N/A, Family="KMR 2", Ground Terminal=No, Housing Material=N/A, HTS=8536501199, Illumination Type=N/R, Manufacturer Part Number=KMR221NGLFS, Maximum AC Voltage Rating=N/A, Mechanical Life="200000 Cycles", Mounting="Surface Mount,Gull Wing", Packaging="Tape and Reel", Part No=KMR221NGLFS, Pole Throw Configuration=SPST, Pricing 1="10=0.278, 500=0.264, 1000=0.208, 5000=0.204, 10000=0.2 (GBP)", Product Weight=N/A, RoHS=Yes, Seal Description=N/A, Seal Location=N/A, Stock 1=5345, Supplier 1="C&K Components", Supplier Standard Pack=7,000, Switch Configuration=N.O., Type=Micro-Miniature
T1 T2 T3 T4 T5 T6 T7 T8 T9: "Test point"
U1: library part MCP25625-E/ML, "MICROCHIP         MCP25625-E/ML            CAN Bus, Controller with Transceiver, CAN, SPI, 3, 2, 2.7 V, 5.5 V, QFN", Manufacturer=Microchip, Maximum Operating Temperature="+ 125 C", Minimum Operating Temperature="- 40 C", Operating Supply Current="70 mA", Operating Supply Voltage="4.5 V to 5.5 V", Package / Case=QFN-28, Supplier Part Number 1=2448754, Supply Voltage - Max="5.5 V", Supply Voltage - Min="2.7 V, 4.5 V", Brand="Microchip Technology", ComponentLink1Description=http://ww1.microchip.com/downloads/en/DeviceDoc/20005282A.pdf, ComponentLink1URL=http://ww1.microchip.com/downloads/en/DeviceDoc/20005282A.pdf, ComponentLink2Description=http://uk.rs-online.com/webdocs/137c/0900766b8137cddf.pdf, ComponentLink2URL=http://uk.rs-online.com/webdocs/137c/0900766b8137cddf.pdf, ComponentLink3Description=http://www.mouser.com/ds/2/268/20005282B-708896.pdf, ComponentLink3URL=http://www.mouser.com/ds/2/268/20005282B-708896.pdf, ComponentLink4Description=https://www.distrelec.biz/Web/Downloads/_t/ds/MCP25625_eng_tds.pdf?mime=application%2Fpdf, ComponentLink4URL=https://www.distrelec.biz/Web/Downloads/_t/ds/MCP25625_eng_tds.pdf?mime=application%2Fpdf, ComponentLink5Description=http://www.farnell.com/datasheets/1821191.pdf, ComponentLink5URL=http://www.farnell.com/datasheets/1821191.pdf, ComponentLink6Description=http://www.microchip.com/mymicrochip/filehandler.aspx?ddocname=en568896, ComponentLink6URL=http://www.microchip.com/mymicrochip/filehandler.aspx?ddocname=en568896, Data Rate="1 Mb/s", Factory Pack Quantity=61, Interface Type="Serial, 4-Wire, SPI", Isolation Type=Non-Isolated, Manufacturer Part Number=MCP25625-E/ML, Mounting Style=SMD/SMT, Number of Drivers="1 Driver", Number of Receivers="1 Receiver", Number of Transceivers="1 Transceiver", Packaging=Bulk, Pricing 1="1=2.28, 10=2.08, 25=1.87, 100=1.71 (EUR)", Product="CAN Controllers", Product Category="CAN Interface IC", Propagation Delay Time="125 ns", Protocol Supported="CAN 2.0B", RoHS=True, Series=MCP2562, Stock 1=82, Supplier 1=Farnell, Type="CAN Controller/Transceiver", Unit Weight="0.002497 oz"
U2 U3: "Voltage Regulators - Switching Regulators 3V-17V, 300mA Buck Converter", Current - Output=300mA, Frequency - Switching=1MHz, Manufacturer="Texas Instruments", Operating Temperature="-40°C ~ 85°C", Standard Package=3,000, Supplier Part Number 1=2769414RL, Voltage - Input="3 V ~ 17 V", Voltage - Output="1.2 V ~ 10 V", Category="Integrated Circuits (ICs)", ComponentLink1Description=https://datasheet.ciiva.com/28375/tps62125-28375971.pdf, ComponentLink1URL=https://datasheet.ciiva.com/28375/tps62125-28375971.pdf, ComponentLink2Description=https://datasheet.ciiva.com/6598/tps62125-6598733.pdf, ComponentLink2URL=https://datasheet.ciiva.com/6598/tps62125-6598733.pdf, Family="PMIC - Voltage Regulators - DC DC Switching Regulators", Featured Product="WEBENCH Design Center", Manufacturer Part Number=TPS62125DSGR, Number of Outputs=1, Output Type=Adjustable, PWM Type=Hybrid, Series=DCS-Control™, Stock 1=0, Supplier 1=Farnell, Synchronous Rectifier=Yes, Type="Step-Down (Buck)"
U4: library part "Lora Module Murata ES0", "Lora Module Murata"
X1: library part LFXTAL059585, "IQD FREQUENCY PRODUCTS         LFXTAL059585             CRYSTAL, 20MHZ, 10PF, 2MM X 1.6MM                          New", Crystal Case="SMD, 2mm x 1.6mm", Frequency Nom=20MHz, Frequency Stability + / -=20ppm, Frequency Tolerance + / -=15ppm, Load Capacitance=10pF, Manufacturer=IQD, Operating Temperature Max=85°C, Operating Temperature Min=-40°C, Supplier Part Number 1=2627212, ComponentLink1Description=http://www.farnell.com/datasheets/2117914.pdf, ComponentLink1URL=http://www.farnell.com/datasheets/2117914.pdf, Manufacturer Part Number=LFXTAL059585, Pricing 1="1=0.815, 5=0.783, 10=0.765, 20=0.747, 40=0.729, 100=0.711, 500=0.693 (EUR)", Product Range="IQXC-42 20MHZ Series", Stock 1=62, Supplier 1=Farnell, SVHC="No SVHC (20-Jun-2016)"

## Free pads (board coordinates)
  round 2.54 hole 2.54 unplated: ""(80.6,96.9) ""(80.7,114.7)
  round 2.286 hole 2.286 unplated: ""(126.36,96.1) ""(126.36,115.47)

## Via types
v1: diameter 0.5, hole 0.3, Top Layer to Bottom Layer, tented both sides, 242 vias
v2: diameter 0.5, hole 0.3, Top Layer to Bottom Layer, 18 vias

## Nets (pads, with @x,y where several pads share a name; then routed paths per layer and width w, separated by ;. In a path a pad name is that pad's centre, name@x,y a point inside that pad or via, vN(x,y) a via of type N, cw(c..) or ccw(c..) an arc to the next point about the centre after c; other vN are vias at no path point)
+3V3: B1.1 C5.1 C6.2 C7.2 C8.1 C9.1 C10.2 C11.2 P1.1 P2.14 P2.15 R2.2 R6.2 R7.1 R12.2 R13.2 U1.3 U1.11 U4.4 U4.5 U4.6 U4.32 | length 126
  Top Layer w0.203: 102.96,106.246 103.406,105.801 103.448,105.801 104.25,104.998 U1.3
  Top Layer w0.254: v1(97.76,105.12) 98.183,105.12 C6.2 ; C5.1@98.56,101.02 99.23,101.02 99.72,101.51 100.71,101.51 U1.11 ; 110.083,105.99 110.148,105.925 111.28,105.925 111.445,106.09 U4.6@112.38,106.09
  Top Layer w0.305: 110.083,105.99 C10.2@110.11,106.09 ; U4.6@112.38,106.09 113.58,106.09 113.68,106.19 113.68,107.47 113.46,107.69 U4.4@112.38,107.69 ; U4.5@112.38,106.89 113.53,106.89 113.68,107.04
  Top Layer w0.381: U4.32@124.18,106.9 126.567,106.9 C11.2
  Top Layer w0.635: R7.1@123.569,97.73 123.669,97.63 125,97.63 125.98,98.61 v1(125.98,100.24) ; v1(126.42,104.81) 126.577,104.968 C11.2 126.577,107.927 128.49,109.84 128.49,110.858 R12.2@128.288,111.06
  Top Layer w0.762: B1.1@89.56,114.39 89.56,106.25 89.798,106.012 ; B1.1@89.652,109.44 90.2,109.44 93.48,112.72 93.48,114.054 P1.1@95.25,115.824 ; P2.14 P2.15 89.272,97.273 89.272,98.03 88.17,99.132 88.17,102.06 89.798,103.688 89.798,106.012 ; v1(92.74,105.69) 90.358,105.69 89.798,106.25 89.798,106.012 ; C5.1@98.56,101.02 C6.2@98.56,104.45 ; v1(106.73,106.43) 106.73,106.02 107.48,105.27 109.293,105.27 110.083,105.99 ; C10.2@110.11,106.09 110.11,110.847 110.823,111.56 v1(110.86,111.56) ; R13.2@128.46,112.368 128.46,111.15 v1(129.76,111.15)
  Bottom Layer w0.254: 94.71,102.88 95.48,103.65 95.48,104.438 96.482,105.44 97.44,105.44 v1(97.76,105.12)
  Bottom Layer w0.635: v1(92.74,105.69) 92.74,105.23 93.05,104.92 93.36,104.92 ; 94.71,102.88 93.36,104.23 93.36,104.92 ; v1(106.73,106.43) 106.64,106.52 v1(102.91,106.52) 95.896,106.52 94.939,105.563 94.939,105.56 94.5,105.121 94.497,105.121 94.296,104.92 93.36,104.92 ; v1(125.98,100.24) 125.98,104.49 126.3,104.81 v1(126.42,104.81)
  Bottom Layer w0.762: v1(110.86,111.56) 129.35,111.56 v1(129.76,111.15)
+5V: C17.1 P1.3 R17.2 U1.19 | length 37.5
  Top Layer w0.203: 97.61,97.45 103.036,97.45 103.417,97.831 103.901,97.831 104.25,98.18 U1.19@104.25,98.61
  Top Layer w0.254: R17.2@100.102,105.85 R17.2@100.102,106.25
  Top Layer w0.305: C17.1 94.99,100.47 95.35,100.11 95.35,99.06 96.91,97.5 97.65,97.5
  Top Layer w0.381: C17.1@95.02,100.947 95.88,101.807 95.88,105.802 ; 95.81,105.75 95.88,105.82
  Top Layer w0.508: v1(93.9,105.75) 95.81,105.75 ; 95.88,105.802 100.054,105.802 R17.2@100.102,105.85 ; v1(97.32,110) 97.32,113.53 98.29,114.5 v1(98.54,114.5)
  Bottom Layer w0.508: v1(93.9,105.75) 93.82,105.83 93.82,106.5 v1(97.32,110) ; v1@98.525,114.515 99.834,115.824 P1.3@100.33,115.824
+12V: C2.1 C16.1 P3.3 P3.6 P4.3 P4.6 P5.3 P5.6 P6.3 P6.6 U2.2 U2.3 U3.2 U3.3 | length 118.2
  Top Layer w0.254: 81.737,101.937 81.79,101.99 U2.2 U2.3 ; 98.22,110.89 98.4,110.71 U3.2 U3.3
  Top Layer w0.508: P6.3 143.39,105.383 145.18,107.173 P6.6
  Top Layer w0.635: C2.1 81.737,101.937 ; 98.22,110.89 98.22,112.08 98.407,112.267 C16.1@98.407,112.55 ; C16.1@98.3,112.675 99.2,113.575 v1(99.2,113.65)
  Top Layer w0.762: P3.3 C2.1@79.4,101.9 ; P4.3 137.35,104.66 139.75,104.66 ; P4.6 139.98,104.65 P6.3
  Bottom Layer w0.508: P5.6 64.64,104.97 66.43,106.76 P5.3 ; P3.6 P3.6@75.79,109.67
  Bottom Layer w0.635: P3.6@75.79,109.67 75.843,109.723 87.304,109.723 91.242,113.66 v1@99.35,113.66 ; v1@99.35,113.65 99.53,113.83 103.776,113.83 105.116,112.49 132.14,112.49 P4.6
  Bottom Layer w0.762: P5.3 67.009,107.969 70.61,107.969 ; P3.3 74.12,101.9 70.64,105.38 70.64,107.939 70.61,107.969 ; P3.6 73.53,109.52 71.979,107.969 70.61,107.969
ANT: C12.1 C13.2 U4.26 | length 3.4
  Top Layer w0.5: U4.26@124.182,102.096 124.188,102.09 C13.2 C12.1@127.57,102.09
BOOT0: P2.1 R9.1 U4.43 | length 26.3
  Top Layer w0.203: U4.43@117.89,111.15 117.74,111 117.74,109.53 117.93,109.34 119.19,109.34 119.339,109.192 119.339,101.959 v1(119.11,101.73) ; v1(124.88,98.57) 125,98.69 v1(125,100.12)
  Top Layer w0.254: U4.43@117.89,111.15 U4.43@117.909,111.169
  Top Layer w0.305: U4.43@117.909,111.169 117.909,112.99 R9.1@118.299,113.38
  Bottom Layer w0.203: v1(119.11,101.73) 121.51,101.73 122.39,102.61 123.07,102.61 123.7,101.98 123.7,101.26 124.84,100.12 v1(125,100.12) ; P2.1 124.88,97.321 v1(124.88,98.57)
CANH: P3.1 P4.1 P5.1 P6.1 R10.2 U1.13 | length 104.2
  Top Layer w0.203: v1(97.36,98.09) 97.36,98.545 98.724,99.909 99.258,99.909 99.519,100.17 U1.13
  Top Layer w0.254: P5.1 66.79,109.06 67.305,109.06 68.745,107.62 72.27,107.62 v1(72.93,106.96) ; v1(73.11,100.26) 73.11,103.65 73.5,104.04 v1(74.01,104.04) ; P3.1 76.22,96.82 78.7,99.3 79.352,99.3 R10.2@79.652,99 ; P4.1 137.85,97.08 P6.1
  Bottom Layer w0.254: v1(72.93,106.96) 72.61,106.64 72.61,105.32 73.89,104.04 v1(74.01,104.04) ; v1(73.11,100.26) 73.11,99.05 75.34,96.82 P3.1 76.17,96.82 78.478,99.128 91.872,99.128 92.877,98.123 v1@97.36,98.123 ; v1(97.36,98.09) 98.18,97.27 100.528,97.27 100.748,97.49 107.086,97.49 109.65,100.054 111.8,100.054 111.802,100.052 121.073,100.052 121.996,99.128 126.922,99.128 128.97,97.08 P4.1
CANL: P3.2 P4.2 P5.2 P6.2 R10.1 U1.12 | length 103.7
  Top Layer w0.203: v1(96.74,98.75) 96.91,98.75 98.45,100.29 99.1,100.29 99.63,100.82 U1.12
  Top Layer w0.254: P5.2 67.23,108.35 v1(68.42,107.16) ; P3.2 76.06,99.36 77,100.3 80.299,100.3 81.129,99.47 R10.1 ; P4.2 137.75,99.62 141.82,103.69 P6.2
  Bottom Layer w0.203: v1(96.74,98.75) 96.74,99.34 96.78,99.38